# Altium PCB ESP32.PcbDoc
Units mil, origin at the board's own origin, x right, y up, seen from the top; angles counter-clockwise.
Board outline 1115 x 1915 mil, 4 copper layers (Top Layer, GND, PWR, Bottom Layer), stack 23.756 mil thick; 30 components, 24 nets, 166 pads, 115 vias.
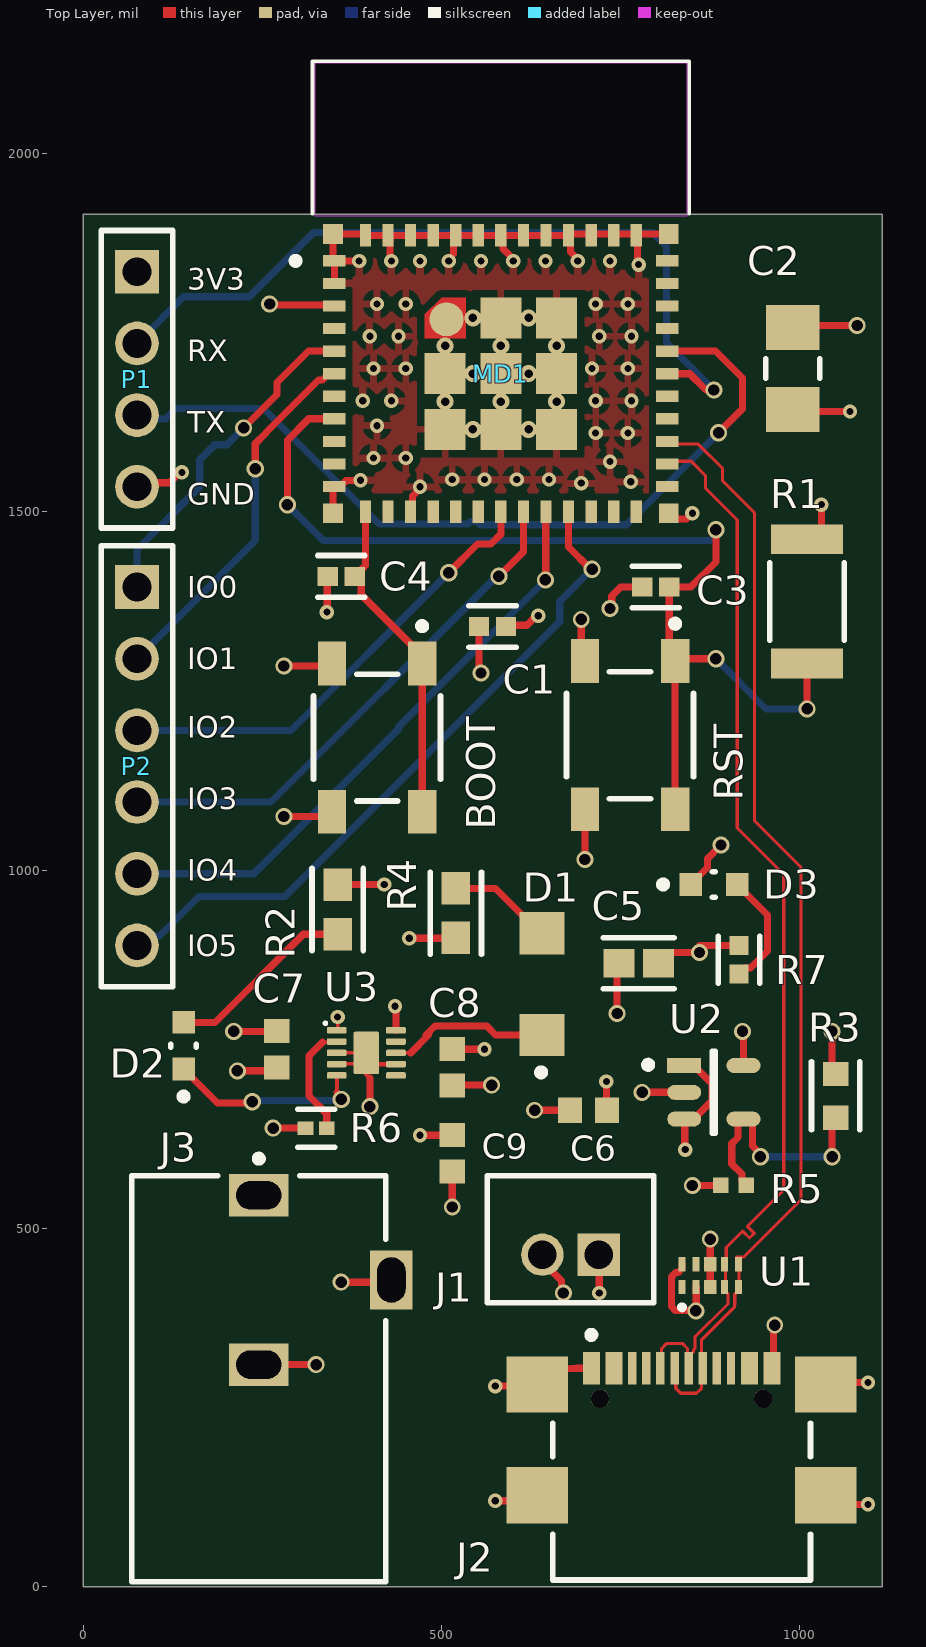
[diagram p0: Top Layer view]
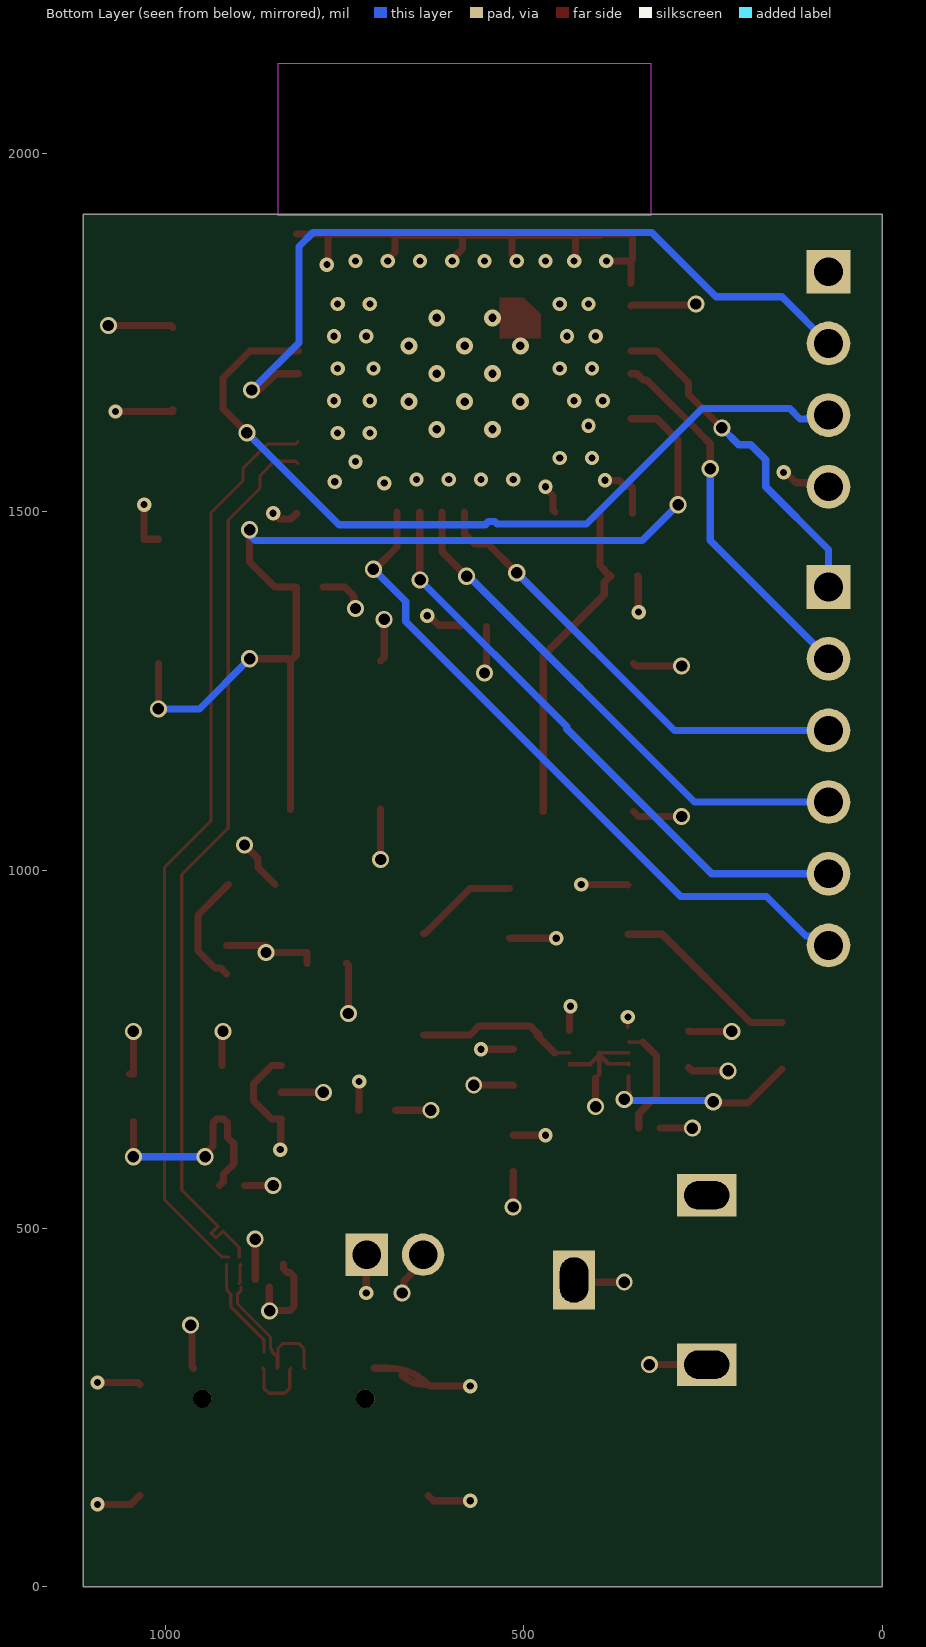
[diagram p1: Bottom Layer view, seen from below]
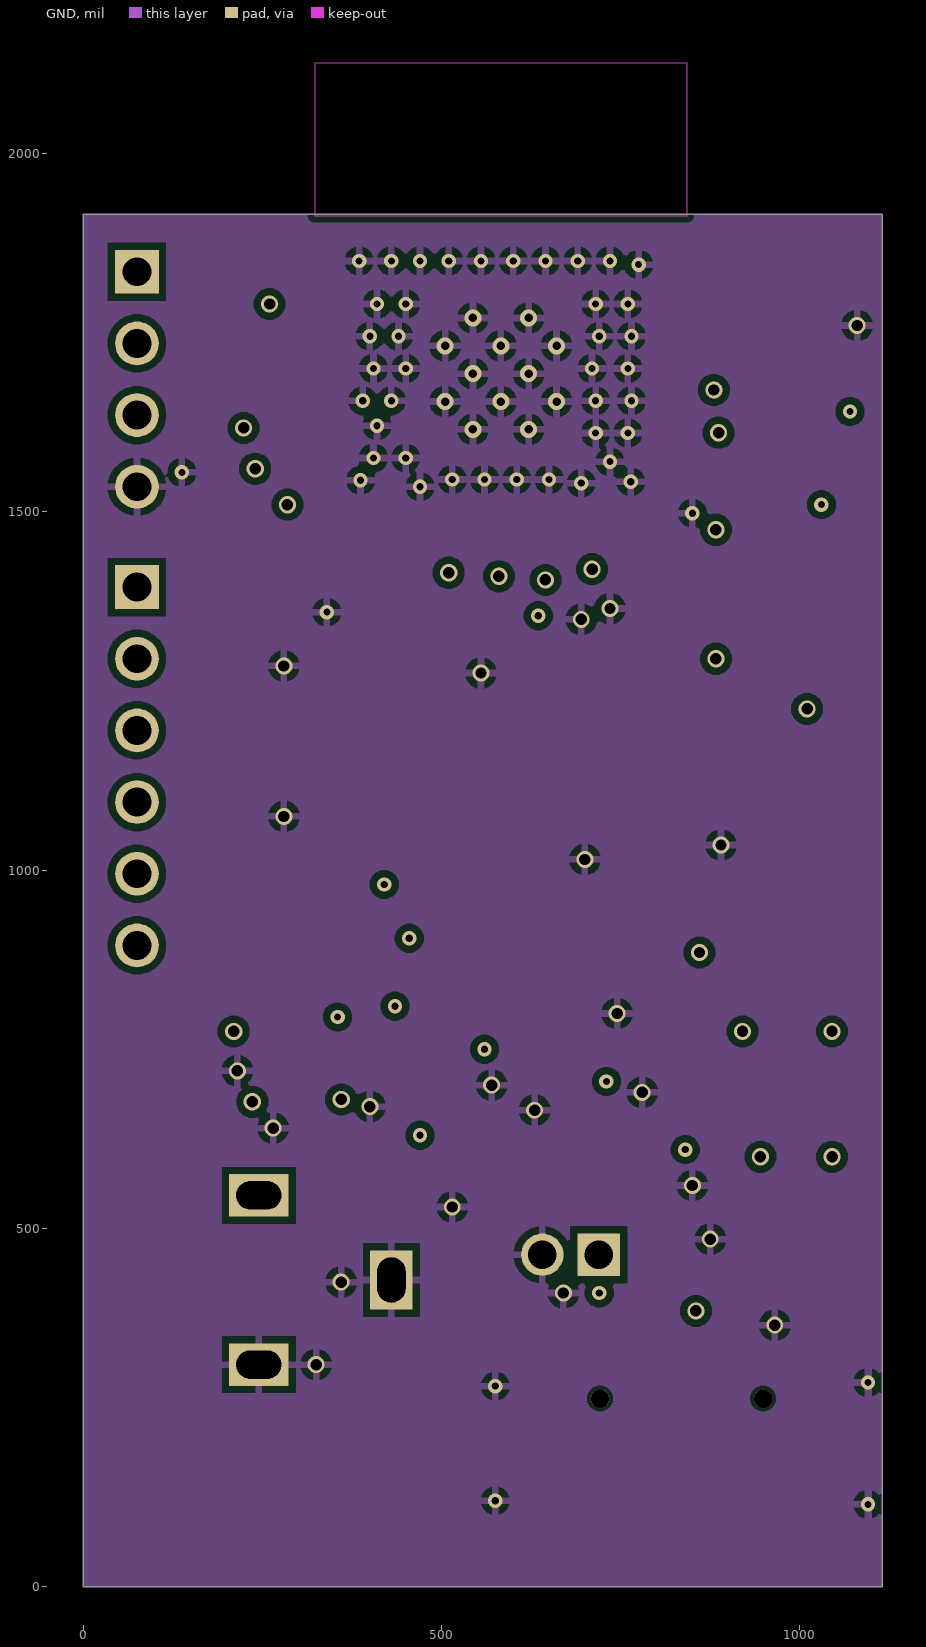
[diagram p2: GND]
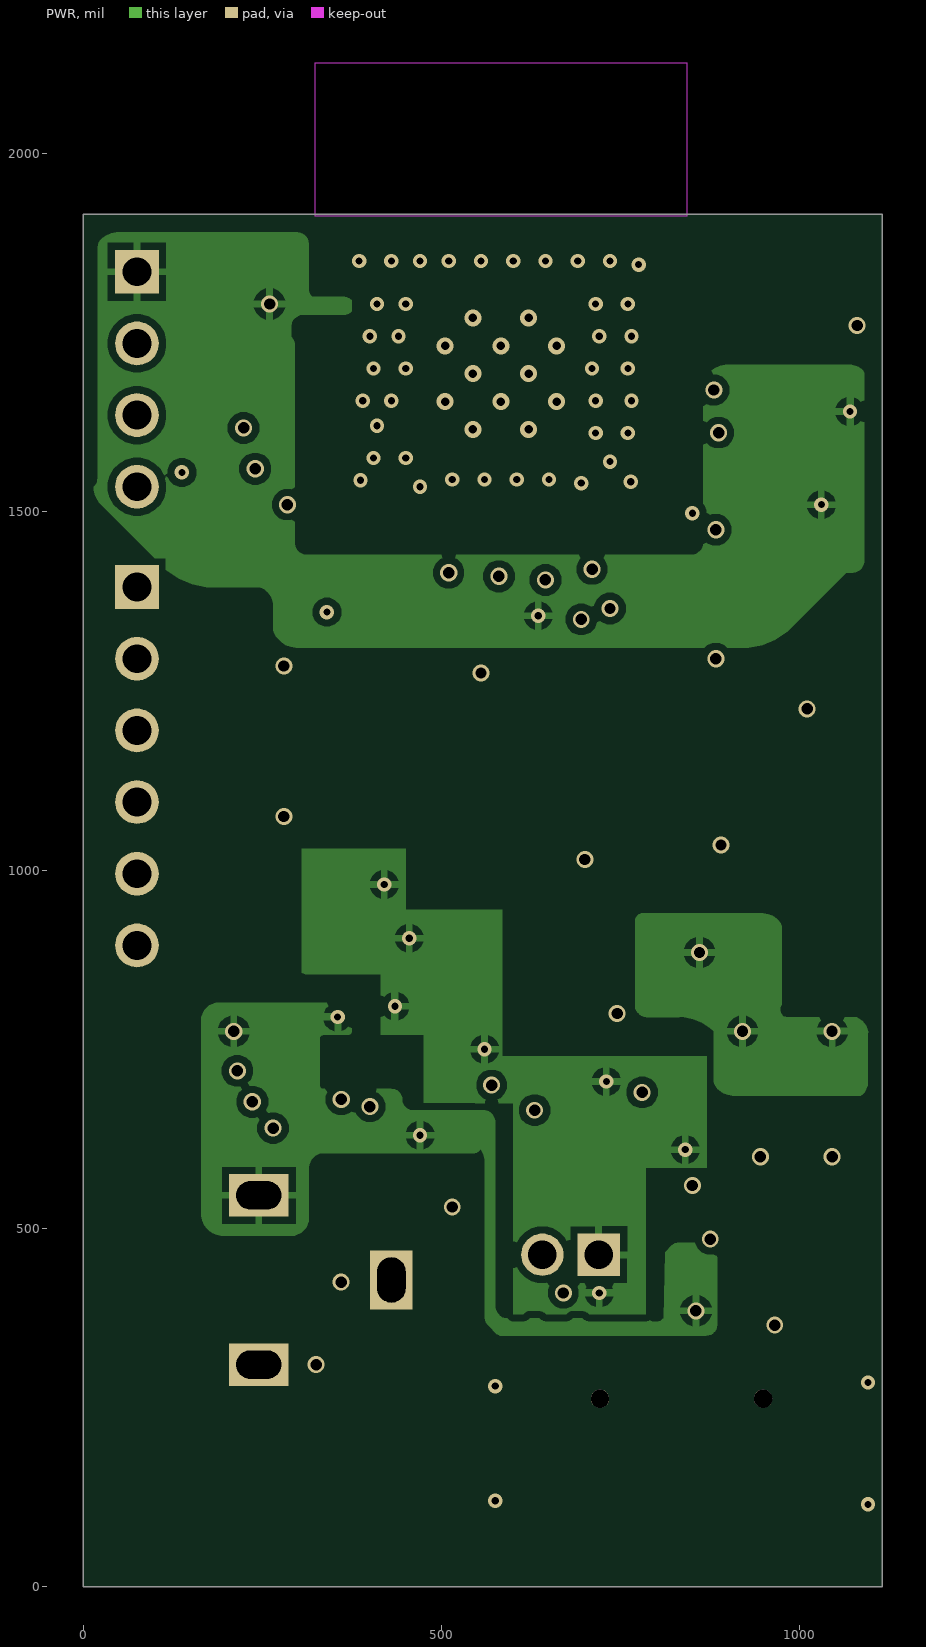
[diagram p3: PWR]
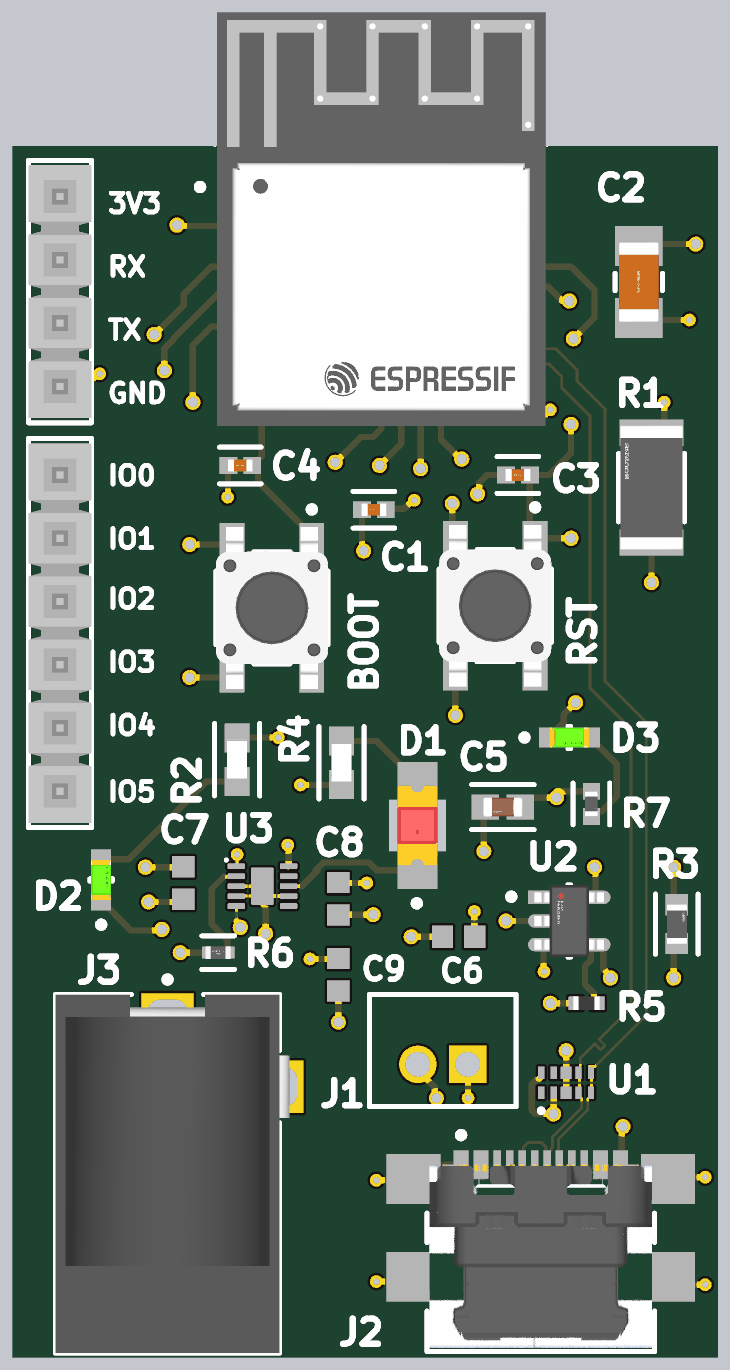
[diagram p4: 3D render of the assembled board from above, using the file's embedded part models]

## Layer stack, top to bottom
Top Solder: solder mask 0.4, Solder Resist, Dk 3.5
Top Layer: signal copper 1.4
Dielectric 1: prepreg 2.8, PP-006, Dk 4.1
GND: signal copper 1.378
Dielectric 2: dielectric 12.6, FR-4, Dk 4.8
PWR: signal copper 1.378
Dielectric 3: prepreg 2.8, PP-006, Dk 4.1
Bottom Layer: signal copper 1.4
Bottom Solder: solder mask 0.4, Solder Resist, Dk 3.5

## Board outline
0,0 1115,0 1115,1915 0,1915

## Design rules (kind name [scope] priority, off if disabled: settings)
Clearance USBDiff [InDifferentialPair('USB_D')] p1: gap=5 ignorepadtopadclearanceinfootprint=FALSE
Clearance ESP32 [InComponent('C1') OR InComponent('C3') OR InComponent('C4') OR InComponent('U3') OR InComponent('U1') OR InComponent('R6') OR InComponent('J2')] p2: gap=5 ignorepadtopadclearanceinfootprint=FALSE
Clearance [All] p3: gap=10 ignorepadtopadclearanceinfootprint=FALSE
DiffPairsRouting USB [InDifferentialPair('USB_D')] p1: maxlimit=5 minlimit=5 mostfreqgap=5 toplayer_minwidth=4.35 toplayer_maxwidth=4.35 toplayer_prefwidth=4.35 midlayer1_minwidth=2.26 midlayer1_maxwidth=2.26 midlayer1_prefwidth=2.26 midlayer2_minwidth=2.26 midlayer2_maxwidth=2.26 midlayer2_prefwidth=2.26 bottomlayer_minwidth=4.35 bottomlayer_maxwidth=4.35 bottomlayer_prefwidth=4.35 impedanceprofiledriven=TRUE impedanceprofileid={25C95724-DC9A-46B8-899E-AF0878F21530} impedanceprofilevalue=90.000000 maxuncoupledlength=500
DiffPairsRouting [InDifferentialPair('USB_D')] p2: maxlimit=5 minlimit=5 mostfreqgap=5 toplayer_minwidth=4.35 toplayer_maxwidth=4.35 toplayer_prefwidth=4.35 midlayer1_minwidth=2.26 midlayer1_maxwidth=2.26 midlayer1_prefwidth=2.26 midlayer2_minwidth=2.26 midlayer2_maxwidth=2.26 midlayer2_prefwidth=2.26 bottomlayer_minwidth=4.35 bottomlayer_maxwidth=4.35 bottomlayer_prefwidth=4.35 impedanceprofiledriven=TRUE impedanceprofileid={25C95724-DC9A-46B8-899E-AF0878F21530} impedanceprofilevalue=90.000000 maxuncoupledlength=500
MinimumSolderMaskSliver SmallerComp [InComponent('U1') OR InComponent('U3') OR InComponent('MDI') OR InComponent('J2')] p1: minsoldermaskwidth=1
MinimumSolderMaskSliver SmallComp [All] p2: minsoldermaskwidth=4
MinimumSolderMaskSliver [All] p3: minsoldermaskwidth=10
PolygonConnect [All] p1: connectstyle=Relief reliefconductorwidth=10 reliefentries=4 polygonreliefangle="90 Angle" airgapwidth=10
RoomDefinition Room_U3 [InComponentClass('Room Definition1')] p1: confinementstyle=ConfineIn formatcopy=TRUE lockcomponents=FALSE outline 323.98,688.74 323.98,801.26 465.04,801.26 465.04,688.74
RoutingVias [All] p1: holewidth=28 width=50 viastyle="Through Hole" minholewidth=28 minwidth=50 maxholewidth=28 maxwidth=50
SilkToSolderMaskClearance MinSilkClearance [InComponent('U3') OR InComponent('C2') OR InComponent('D1') OR InComponent('R1')] p1: minsilkscreentomaskgap=2 clearancetoexposedcopper=TRUE
SilkToSolderMaskClearance [IsPad] p2: minsilkscreentomaskgap=10 clearancetoexposedcopper=TRUE
SolderMaskExpansion [All] p1: expansion=4 istentingtop=FALSE
SupplyNets "Schematic Supply Nets" [InNet('GND')] p1: voltage=0.000
Width RoomCon [WithinRoom('Room_U3')] p1: maxlimit=6 minlimit=5 preferedwidth=5
Width [All] p2: maxlimit=10 minlimit=10 preferedwidth=10
27 further rules are at their usual default settings.

## Classes and differential pairs
component class "Room Definition1": U3
differential pair USB_D: +USB_D_P -USB_D_N

## Components (designator, comment, footprint, x,y, rotation, side; value= is the part's Value field where it differs from the comment)
BOOT "BOOT" FP-PTS647SM38SMTR2LFS-MFG 410,1185 r270 top (schematic designator SW2)
C1 "HMK105B7103MVHFE" FP-0402-L_1_0_0_05-W_0_5-IPC_A 571.16,1340 r180 top
C2 "LMK316AB7106ML-T" FP-1206-L_3_2_0_2-W_1_6_0-IPC_A 990,1700 r90 top
C3 "HMK105B7103MVHFE" FP-0402-L_1_0_0_05-W_0_5-IPC_A 798.84,1395 r180 top
C4 "HMK105B7103MVHFE" FP-0402-L_1_0_0_05-W_0_5-IPC_A 360,1410 r180 top
C5 "GRM188Z71A106KA73J" FP-GRM188-0_2-IPC_B 775,870 r180 top
C6 "C0603C105K4RACTU" CAPC1608X90X35LL15T15 705,665 r0 top
C7 "C0603C105K4RACTU" CAPC1608X90X35LL15T15 270,750 r90 top
C8 "C0603C105K4RACTU" CAPC1608X90X35LL15T15 515,725 r90 top
C9 "C0603C105K4RACTU" CAPC1608X90X35LL15T15 515,605 r90 top
D1 "LTST-C230EKT" FP-LTST-C230EKT-MFG 640,840.87 r90 top
D2 "APT1608ZGCK" FP-APT1608ZGCK-MFG 140,755 r90 top
D3 "APT1608ZGCK" FP-APT1608ZGCK-MFG 880,980 r0 top
J1 "B2B-PH-K-S(LF)(SN)" JST-B2B-PH-K-S_V 680,485 r180 top
J2 "USB4110-GF-A" FP-USB4110-GF-A-MFG 835,160 r0 top
J3 "PJ-102BH" CUI-PJ-102BH_V 245,428.11 r270 top
MD1 "ESP32-C3-MINI-1-N4" FP-ESP32-C3-MINI-1-N4-MFG 582.76,1692.76 r0 top
P1 "TSW-104-08-G-S" SMTC-TSW-104-08-X-S 75,1835 r270 top
P2 "TSW-106-23-G-S" SMTC-TSW-106-23-X-S 75,1395 r270 top
R1 "CR2010-JW-103ELF" FP-CR2010-IPC_C 1010,1375 r90 top
R2 "RN73R1JTTD1501B25" FP-RN73R1J-IPC_A 355,945 r270 top
R3 "AT0603BRD0740KL" FP-AT0603-IPC_B 1050,685 r90 top
R4 "RN73R1JTTD1501B25" FP-RN73R1J-IPC_A 520,940 r90 top
R5 "ERJ-2RKF2003X" RESC1005X40X25NL05T05 907.28,560 r0 top
R6 "CRGCQ0402J1K0" FP-CRGCQ0402-IPC_C 325,640 r180 top value=1KΩ
R7 "TFCR0402-16W-E-1001DT" FP-TFCR0402-IPC_A 915,875 r270 top
RST "RESET" FP-PTS647SM38SMTR2LFS-MFG 762.99,1188.35 r270 top (schematic designator SW1)
U1 "ESD7104MUTAG" ONSC-UDFN-10-517BB-01_V 875,434.25 r90 top
U2 "TLV75801PDBVR" FP-DBV0005A-IPC_C 880,690 r0 top
U3 "BQ24040DSQR" DSQ0010A_V 395,745 r0 top

## Footprints (in the part's own frame and the unit in brackets; to place one, negate y for a bottom-side part, rotate by r counter-clockwise, add the part's x,y. Pads: shape width x height; smd on the part's side, far side on the other; paste and mask are expansions set on the pad)
CAPC1608X90X35LL15T15 [mm] "Chip Capacitor, 2-Leads, Body 1.60x0.81mm, IPC High Density"
  rect 0.85x0.9 smd: 1(-0.65,0) 2(0.65,0)
  body extent -0.88,-0.48 0.87,0.48, height 0.9
CUI-PJ-102BH_V [mm] "THD, 3-Leads, Body 14.4x9mm, Height 11mm"
  rect 1.5x2.1 hole 1 slot 1.6 at 90 deg: 1(-3,0) 2(3,0)
  rect 2.1x1.5 hole 1 slot 1.6 at 0 deg: 3(0,4.7)
  silkscreen extent -4.42,-4.5 10.7,4.5, body extent -3.7,-4.5 10.7,4.9, height 11
DSQ0010A_V [mm] "SON, 10-Leads, Body 2x2mm, Pitch 0.4mm, Thermal Pad 1.5x0.9mm"
  rrect43% 0.7x0.23 smd: 1(-1.05,0.8) 2(-1.05,0.4) 3(-1.05,0) 4(-1.05,-0.4) 5(-1.05,-0.8) 6(1.05,-0.8) 7(1.05,-0.4) 8(1.05,0) 9(1.05,0.4) 10(1.05,0.8)
  rrect11% 0.9x1.5 smd: 11(0,0)
  silkscreen extent -1.5,1 -1.4,1.1, body extent -1,-1 1,1, height 0.8
FP-0402-L_1_0_0_05-W_0_5-IPC_A [mil]
  rect 28.16x26.48 smd paste+0 mask+0: 1(-18.84,0) 2(18.84,0)
  silkscreen extent -33,-29 33,29, body extent -41,-21 41,21, height 10
FP-1206-L_3_2_0_2-W_1_6_0-IPC_A [mil]
  rect 63.17x75.05 smd paste+0 mask+0: 1(-57.12,0) 2(57.12,0)
  silkscreen extent -14,-38 14,38, body extent -108,-57 108,57, height 10
FP-APT1608ZGCK-MFG [mm]
  rect 0.8x0.8 smd paste+0 mask+0: 1(-0.825,0) 2(0.825,0)
  silkscreen extent -1.92,-0.45 0.05,0.45, body extent -1.33,-0.55 1.33,0.55, height 0.25
FP-AT0603-IPC_B [mil]
  rect 33.81x35.91 smd paste+0 mask+0: 1(-30.58,0) 2(30.58,0)
  silkscreen extent -47,-34 47,34, body extent -57,-28 57,28, height 10
FP-CR2010-IPC_C [mil]
  rect 41.56x100.72 smd paste+0 mask+0: 1(-86.66,0) 2(86.66,0)
  silkscreen extent -54,-52 54,52, body extent -111,-56 111,56, height 10
FP-CRGCQ0402-IPC_C [mil]
  rect 22.03x18.6 smd paste+0 mask+0: 1(-14.81,0) 2(14.81,0)
  silkscreen extent -26,-27 26,27, body extent -30,-15 30,15, height 10
FP-DBV0005A-IPC_C [mm]
  rect 1.205x0.532 smd paste+0 mask+0: 1(-1.05,0.95)
  rrect100% 1.205x0.532 smd paste+0 mask+0: 2(-1.05,0) 3(-1.05,-0.95) 4(1.05,-0.95) 5(1.05,0.95)
  silkscreen extent -2.45,-1.45 0.05,1.45, body extent -1.75,-1.55 1.75,1.55, height 0.25
FP-ESP32-C3-MINI-1-N4-MFG [mm]
  rect 0.8x0.4 smd paste+0 mask+0: 1(-5.9,4) 2(-5.9,3.2) 3(-5.9,2.4) 4(-5.9,1.6) 5(-5.9,0.8) 6(-5.9,0) 7(-5.9,-0.8) 8(-5.9,-1.6) 9(-5.9,-2.4) 10(-5.9,-3.2) 11(-5.9,-4) 25(5.9,-4) 26(5.9,-3.2) 27(5.9,-2.4) 28(5.9,-1.6) 29(5.9,-0.8) 30(5.9,0) 31(5.9,0.8) 32(5.9,1.6) 33(5.9,2.4) 34(5.9,3.2) 35(5.9,4)
  rect 0.4x0.8 smd paste+0 mask+0: 12(-4.8,-4.9) 13(-4,-4.9) 14(-3.2,-4.9) 15(-2.4,-4.9) 16(-1.6,-4.9) 17(-0.8,-4.9) 18(0,-4.9) 19(0.8,-4.9) 20(1.6,-4.9) 21(2.4,-4.9) 22(3.2,-4.9) 23(4,-4.9) 24(4.8,-4.9) 36(4.8,4.9) 37(4,4.9) 38(3.2,4.9) 39(2.4,4.9) 40(1.6,4.9) 41(0.8,4.9) 42(0,4.9) 43(-0.8,4.9) 44(-1.6,4.9) 45(-2.4,4.9) 46(-3.2,4.9) 47(-4,4.9) 48(-4.8,4.9)
  rect 1.45x1.45 smd paste+0 mask+0: 49(-1.975,-1.975) 49(-1.975,0) 49(0,-1.975) 49(0,0) 49(0,1.975) 49(1.975,-1.975) 49(1.975,0) 49(1.975,1.975)
  round 1.207 smd paste+0 mask+0: 49(-1.926,1.926)
  rect 0.7x0.7 smd paste+0 mask+0: 50(5.95,4.95) 51(5.95,-4.95) 52(-5.95,-4.95) 53(-5.95,4.95)
  Top Layer region: -2.7,1.25 -2.7,2.1 -2.1,2.7 -1.25,2.7 -1.25,1.25
  Keep-Out Layer region: -6.6,5.6 6.6,5.6 6.6,11 -6.6,11
  silkscreen extent -7.4,3.88 6.68,11.07, body extent -6.78,-5.77 6.78,11.17, height 0.25
FP-GRM188-0_2-IPC_B [mil]
  rect 43.51x39.61 smd paste+0 mask+0: 1(-27.58,0) 2(27.58,0)
  silkscreen extent -49,-36 49,36, body extent -59,-30 59,30, height 10
FP-LTST-C230EKT-MFG [mm]
  rect 1.5x1.6 smd paste+0 mask+0: 1(-1.8,0) 2(1.8,0)
  silkscreen extent -3.25,-0.1 -3,0.15, body extent -2.65,-0.95 2.65,0.95, height 0.25
FP-PTS647SM38SMTR2LFS-MFG [mm]
  rect 1.55x1 smd paste+0 mask+0: 1(-2.625,1.6) 2(2.625,1.6) 3(-2.625,-1.6) 4(2.625,-1.6)
  silkscreen extent -4.07,-2.25 2.25,2.25, body extent -3.5,-2.42 3.5,2.42, height 0.25
FP-RN73R1J-IPC_A [mil]
  rect 45.5x39.85 smd paste+0 mask+0: 1(-34.46,0) 2(34.46,0)
  silkscreen extent -57,-36 57,36, body extent -77,-40 77,40, height 10
FP-TFCR0402-IPC_A [mil]
  rect 26.19x26.48 smd paste+0 mask+0: 1(-19.83,0) 2(19.83,0)
  silkscreen extent -33,-29 33,29, body extent -41,-21 41,21, height 10
FP-USB4110-GF-A-MFG [mm]
  rect 2.18x2 smd paste+0 mask+0: 1(-5.11,3.105) 2(5.11,3.105) 3(-5.11,-0.825) 4(5.11,-0.825)
  rect 0.6x1.15 smd paste+0 mask+0: A1-B12(-3.2,3.68) A4-B9(-2.4,3.68) B1-A12(3.2,3.68) B4-A9(2.4,3.68)
  rect 0.3x1.15 smd paste+0 mask+0: A5(-1.25,3.68) A6(-0.25,3.68) A7(0.25,3.68) A8(1.25,3.68) B5(1.75,3.68) B6(0.75,3.68) B7(-0.75,3.68) B8(-1.75,3.68)
  round 0.65 hole 0.65 unplated paste-2539.97 mask+0: ""(-2.89,2.605) ""(2.89,2.605)
  silkscreen extent -4.57,-3.83 4.57,4.99, body extent -6.3,-3.92 6.3,4.36, height 0.25
JST-B2B-PH-K-S_V [mm] "Connector, 2-Leads, Body 5.9x4.5mm, Pitch 2mm"
  rect 1.5x1.5 hole 1: 1(-1,0.55)
  round 1.5 hole 1: 2(1,0.55)
  silkscreen extent -2.95,-2.25 2.95,2.25, body extent -2.95,-2.25 2.95,2.25, height 6
ONSC-UDFN-10-517BB-01_V [mm] "SON, 10-Leads, Body 2.5x1mm, Pitch 0.5mm"
  rect 0.5x0.25 smd: 1(-0.4,1) 2(-0.4,0.5) 4(-0.4,-0.5) 5(-0.4,-1) 6(0.4,-1) 7(0.4,-0.5) 9(0.4,0.5) 10(0.4,1)
  rect 0.5x0.45 smd: 3(-0.4,0) 8(0.4,0)
  silkscreen extent -1.17,0.95 -1.08,1.05, body extent -0.5,-1.25 0.5,1.25, height 0.55
RESC1005X40X25NL05T05 [mm] "Chip Resistor, 2-Leads, Body 1.05x0.55mm, IPC Medium Density"
  rect 0.55x0.55 smd: 1(-0.45,0) 2(0.45,0)
  body extent -0.53,-0.28 0.53,0.28, height 0.4
SMTC-TSW-104-08-X-S [mm] ".025 SQ Post Terminal Strip Assembly, 1x4 Pins, Vertical, 2.54mm Pitch, Male"
  rect 1.55x1.55 hole 1.02: 1(0,0)
  round 1.55 hole 1.02: 2(2.54,0) 3(5.08,0) 4(7.62,0)
  silkscreen extent -1.46,-1.27 9.08,1.27, body extent -1.27,-1.27 8.89,1.27, height 8.38
SMTC-TSW-106-23-X-S [mm] ".025 SQ Post Terminal Strip Assembly, 1x6 Pins, Vertical, 2.54mm Pitch, Male"
  rect 1.55x1.55 hole 1.02: 1(0,0)
  round 1.55 hole 1.02: 2(2.54,0) 3(5.08,0) 4(7.62,0) 5(10.16,0) 6(12.7,0)
  silkscreen extent -1.46,-1.27 14.16,1.27, body extent -1.27,-1.27 13.97,1.27, height 8.38

## Part data
BOOT RST: library part CMP-10040-000031-1, "TACT 4.5 X 4.5, 3.8 MM H, 1.8N,", Max Operating Temperature=70°C, Min Operating Temperature=-20°C, Operating Force=180gf, Ratings=IP40, Actuator Type=Standard, Illumination Type=Non-Illuminated, Mechanical Life=100000Cycles, Mount="Surface Mount", Packaging="Cut Tape", Switch Function=Off-Mom, Switch Travel=0.25mm, Termination="Gull Wing", Throw Configuration=SPST
C1 C3 C4: library part CMP-14477-001757-2, "None"
C2: library part CMP-14477-003406-2, "None", Capacitance=10uF, Case/Package=1206, Dielectric=X7R, Max Operating Temperature=125°C, Min Operating Temperature=-55°C, Tolerance=20%, Voltage=10V, Depth=1.6mm, Height=1.6mm, Length=0.126inch, Mount="Surface Mount", Packaging="Tape and Reel", RoHS Compliant=Yes, Thickness=0.071inch, Voltage Rating=10V, Width=0.063inch
C5: library part CMP-06035-020296-1, "Chip Multilayer Ceramic Capacitors for General Purpose, 0603, 10uF, X7R, 15%, 10%, 10V"
C6 C7 C8 C9: library part CMP-2006-02298-2, Manufacturer=Kemet, Part Number=C0603C105K4RACTU
D1: library part CMP-22017-000030-1, "LED RED CLEAR CHIP SMD", Case Code (Imperial)=1206, Case Code (Metric)=3216, Color=Red, Forward Current=30mA, Forward Voltage=2V, Lens Color=Colorless, Max Operating Temperature=85°C, Min Operating Temperature=-55°C, Package Quantity=1, Power Dissipation=100mW, Reverse Voltage=5V, Test Current=10mA, Case/Package=1206, Depth=1.6mm, Dominant Wavelength=621nm, Height=1.1mm, Illumination Color=Red, Lead Free="Lead Free", Length=3.2mm, Lens Style=Diffused, Lens Transparency=Clear, Luminous Intensity=6mcd, Mount="Surface Mount", Number of Elements=1, Number of LEDs=1, Number of Pins=2, Packaging="Tape and Reel", Power Rating=100mW, Radiation Hardening=No, Viewing Angle=130°, Wavelength=630nm, Width=1.6mm
D2 D3: library part CMP-44529-000024-1, "LED GREEN CLEAR CHIP SMD", Case Code (Imperial)=0603, Case Code (Metric)=1608, Color=Green, Forward Current=20mA, Forward Voltage=3.3V, Lens Color=Colorless, Max Operating Temperature=85°C, Min Operating Temperature=-40°C, Package Quantity=1, Case/Package=0603, Dominant Wavelength=525nm, Height=0.75mm, Illumination Color=Green, Lead Free="Lead Free", Length=1.6mm, Lens Transparency=Clear, Luminous Intensity=350mcd, Mount="Surface Mount", Packaging="Tape and Reel", Test Current=20mA, Viewing Angle=120°, Width=0.8mm
J1: library part CMP-2000-05162-1, "Male Header, Pitch 2 mm, 1 x 2 Position, Height 6 mm, Tail Length 3.4 mm, -25 to 85 degC, RoHS, Bulk", Manufacturer=JST, Datasheet URL=http://datasheet.octopart.com/B2B-PH-K-S%28LF%29%28SN%29-JST-datasheet-8324864.pdf, Datasheet Version=Nov-08, Manufacturer URL=http://www.jst.com/home2.html, No of Positions=2, Pitch=2mm, Style/Orientation=StraightHeader/Plug, Termination=Crimp, Type=ShroudedHeader
J2: library part CMP-245163-000002-1, "CONN USB 2.0 TYPE-C R/A SMT", Current Rating=3/4.25/1.25/0.25A, Manufacturer=GCT, Package=0, Temperature="-40°C to +85°C", Temperature Range High=+85°C, Temperature Range Low=-40°C, Voltage Rating=20V, Automotive=No, Category=Conn, ComponentLink2Description=Datasheet, ComponentLink2URL=https://gct.co/files/drawings/usb4110.pdf, Conn Orientation="Right Angle", Contact Material=Gold,Nickel, Device Class L1=Connectors, Device Class L2="USB Connectors", Device Class L3=unset, Digikey Description="CONN USB 2.0 TYPE-C R/A SMT", Height=3.46mm, Is Female=yes, Lead Free=Yes, Manufacturer Part Number=USB4110-GF-A, Number Of Contacts=16, Octopart=https://octopart.com/usb4110-gf-a-gct-103941985, RoHS=TRUE, Shielding=true, Standoff Height=0.1mm, Usb Standard="USB 2.0"
J3: library part CMP-2000-06901-1, "Through Hole Right Angle DC Power Jack, 5 A, 2.5 mm Center Pin, 3 Position, -25 to 85 degC, RoHS, Bulk", Current Rating=5A, Flammability Rating=UL94V-0, Insulation Resistance=100MOhms, Manufacturer=CUIInc., Operating Temperature Range=-25Cto+85C, Package Description="3-Pin Through Hole Device, Body 14.4 x 9 mm, Height 11 mm", Voltage Rating=24V, Brand=CUI, Connector Type=DCPowerJack, Contact Gender=Male, Contact Material=Copper, Contact Plating=Nickel, Datasheet URL=http://www.cui.com/product/resource/pj-102bh.pdf, Datasheet Version="Rev. 1.02, 05/2016", Factory Pack Quantity=280, Housing Material=PolybutyleneTerephthalate(PBT), Inside Contact Diameter=2.5mm, Manufacturer URL=http://www.cui.com/, Mounting Angle=Right, Mounting Style=ThroughHole, Mounting Technology=ThroughHole, Outside Contact Diameter=6.5mm, Package Reference=PJ-102BH, Product=Jacks, Product Category=DCPowerConnectors, RoHS=True, Termination Style=ThroughHole
MD1: library part CMP-10700-116589975-1, "Multiprotocol Modules SMD module, ESP32-C3FN4, PCB antenna, -40 C +85 C", Ambient Temperature Range High=85°C, Current - Receiving=84mA, Current - Transmitting=350mA, Max Frequency=2.484GHz, Max Supply Voltage=3.6V, Min Operating Temperature=-40°C, Min Supply Voltage=3V, Data Rate=150Mbps, Height=2.55mm, Interface=SPI, Max Operating Temperature=85°C, Number of GPIO=13
P1: library part CMP-1024-00357-1, "0.025\" SQ Post Header, Through-hole, Vertical, -55 to 125 degC, 2.54 mm Pitch, 4-Pin, Male, RoHS", Manufacturer=Samtec, Temperature Range="-55 to 125 degC", ComponentLink1Description="Manufacturer URL", ComponentLink1URL=http://www.samtec.com, ComponentLink2Description=Datasheet, ComponentLink2URL=http://www.samtec.com/documents/webfiles/pdf/TSW_TH.PDF, ComponentLink3Description="Package Specification", ComponentLink3URL=http://www.samtec.com/documents/webfiles/cpdf/TSW-XXX-XX-XXX-X-XX-XXX-MKT.pdf, DatasheetVersion=F-214, Mounting Technology=Through-hole, Orientation=Vertical, PackageDescription=".025[0.64] SQ. Post Terminal Strip Assembly", PackageReference=TSW-104-08-X-S, PackageVersion="DM, 8/1988", PartNumber=TSW-104-08-G-S, Pitch="2.54 mm", RoHS=True
P2: library part CMP-1024-00396-1, "0.025\" SQ Post Header, Through-hole, Vertical, -55 to 125 degC, 2.54 mm Pitch, 6-Pin, Male, RoHS", Manufacturer=Samtec, Temperature Range="-55 to 125 degC", ComponentLink1Description="Manufacturer URL", ComponentLink1URL=http://www.samtec.com, ComponentLink2Description=Datasheet, ComponentLink2URL=http://www.samtec.com/documents/webfiles/pdf/TSW_TH.PDF, ComponentLink3Description="Package Specification", ComponentLink3URL=http://www.samtec.com/documents/webfiles/cpdf/TSW-XXX-XX-XXX-X-XX-XXX-MKT.pdf, DatasheetVersion=F-214, Mounting Technology=Through-hole, Orientation=Vertical, PackageDescription=".025[0.64] SQ. Post Terminal Strip Assembly", PackageReference=TSW-106-23-X-S, PackageVersion="DM, 8/1988", PartNumber=TSW-106-23-G-S, Pitch="2.54 mm", RoHS=True
R1: library part CMP-07231-003456-1, "Thick Film Chip Resistors 2010 10kΩ 0.5W 5% 200ppm/°C", Case Code (Imperial)=2010, Case Code (Metric)=5025, Max Operating Temperature=155°C, Min Operating Temperature=-55°C, Package Quantity=4000, Power Rating=500mW, Resistance=10kR, Temperature Coefficient=200ppm/°C, Tolerance=5%, Voltage Rating=200V, Case/Package=2010, Composition="Thick Film", Contact Plating=Tin, Height=0.6mm, Length=5mm, Mount="Surface Mount", Packaging="Tape and Reel", Radiation Hardening=No, Termination=SMD/SMT, Width=2.5mm
R2 R4: library part CMP-04015-030520-1, "1.5kΩ ±0.1% 0.1W, 1/10W Chip Resistor 0603 (1608 Metric) Moisture Resistant Thin Film"
R3: library part CMP-03412-038922-1, "Thin Film Chip Resistors Automotive Grade 40kΩ 0.1% 25ppm/°C 0603"
R5: library part CMP-1011-00768-4, "Chip Resistor, 200 KOhm, +/- 1%, 100 mW, -55 to 155 degC, 0402 (1005 Metric), RoHS, Tape and Reel", Case Code (Imperial)=0402, Case Code (Metric)=1005, Manufacturer="Basic Passives", Max Operating Temperature="155 degC", Min Operating Temperature="-55 degC", Package Quantity=10000, Power Rating="100 mW", Resistance="200 KOhm", Tolerance=1%, Voltage Rating="50 V", Case\/Package=0402, ComponentLink1Description="Manufacturer URL", ComponentLink1URL=http://www.panasonic.com/, ComponentLink2Description=Datasheet, ComponentLink2URL=http://industrial.panasonic.com/cdbs/www-data/pdf/RDA0000/AOA0000C86.pdf, DatasheetVersion=04/2015, Height="0.35 mm", Length="1 mm", Mount="Surface Mount", Mounting Technology="Surface Mount", PackageDescription="2-Pin Surface Mount Device, Body 1 x 0.5 mm", PackageReference=0402, Packaging="Tape and Reel", PartNumber=ERJ-2RKF2003X, Pins=2, Radiation Hardening=No, REACH SVHC="No SVHC", RoHSCompliant=true, Width="0.5 mm"
R6: library part CMP-03211-005510-1, "CRGCQ 0402 1K0 5%", Ambient Temperature Range High=+70°C, Manufacturer="TE Connectivity", Package=CRGCQ0402, Power Rating=0.0625W, Resistance=1KΩ, Temperature="-55°C to +155°C", Temperature Coefficient=±100ppm/°C, Temperature Range High=+155°C, Temperature Range Low=-55°C, Tolerance=0.05, Voltage Rating=50V, Automotive=Yes, Category=Res, ComponentLink2Description=Datasheet, ComponentLink2URL=https://www.te.com/commerce/DocumentDelivery/DDEController?Action=showdoc&DocId=Data+Sheet%7F1773204-3%7F1%7Fpdf%7FEnglish%7FENG_DS_1773204-3_1.pdf%7F4-2176347-695, Composition="Thick Film", Device Class L1="Passive Components", Device Class L2=Resistors, Device Class L3="Chip SMD Resistors", Digikey Description="CRGCQ 0402 1K0 5%", Height=0.4mm, Ipc Land Pattern Name=RESC10050X35, Lead Free=Yes, Manufacturer Part Number=CRGCQ0402J1K0, Octopart=https://octopart.com/crgcq0402j1k0-te+connectivity-91018000, RoHS=TRUE, Series=CRGCQ
R7: library part CMP-250906-247784-1, "RES Thin Film,  1kΩ, 0.5%, 0.063W, 25ppm/°C, 0402"
U1: library part CMP-1063-00242-1, "Transient Voltage Suppressor, Low Capacitance ESD Protection for High Speed Data, 10-Pin UDFN, Pb-Free, Tape and Reel", Manufacturer="On Semiconductor", ComponentLink1Description="Manufacturer URL", ComponentLink1URL=http://www.onsemi.com/, ComponentLink2Description=Datasheet, ComponentLink2URL=http://www.onsemi.cn/pub_link/Collateral/ESD7104-D.PDF, ComponentLink3Description="Package Specification", ComponentLink3URL=http://www.onsemi.com/pub_link/Collateral/517BB.PDF, DatasheetVersion="Rev. 2", Direction=Bidirectional, IR Max (uA)=1, Mounting Technology="Surface Mount", Number of Lines=4, PackageDescription="10-Pin Small Outline No-Lead, Body 2.5 x 1 mm, Pitch 0.5 mm", PackageReference=UDFN-10-517BB-01, PackageVersion="Rev. O, 11/2009", Packing="Tape and Reel", PartNumber=ESD7104MUTAG, RoHS=Pb-Free, V(BR) Min (V)=5.5, VRWM Max (V)=5
U2: library part CMP-04917-000142-1, "IC POWER MANAGEMENT SUPERVISORY"
U3: library part CMP-0321-00456-2, "800 mA, Single-Input, Single Cell Li-Ion Battery Charger with Auto Start. Vovp=6.6 V, 3.5 V, -40 to 85 degC, 10-pin SON (DSQ), Green (RoHS & no Sb/Br)", Manufacturer="Texas Instruments", Over Voltage Protection=N, ComponentLink1Description=Datasheet, ComponentLink1URL=http://www.ti.com/general/docs/lit/getliterature.tsp?genericPartNumber=BQ24040&fileType=pdf, DatasheetVersion=SLUS941A, Eco-Plan="Green (RoHS & no Sb/Br)", Lead Acid=N, Li-Ion=N, Li-Polymer=N, Mounting Technology="Surface Mount", NiCd=N, NiMH=N, PackageDescription="10-Pin Plastic Small Outline No-Lead, 2 x 2 x 0.8 mm Body, 0.4 mm Pitch, Exposed Pad", PackageReference=DSQ0010A, PackageVersion="revB, Apr-2010", PartNumber=BQ24040DSQR, SubFamily="Battery Charge Management", Vin(Min)(V)=3.5

## Via types
v1: diameter 20, hole 10, Top Layer to Bottom Layer, 59 vias
v2: diameter 23.62, hole 15.75, Top Layer to Bottom Layer, 25 vias
v3: diameter 24, hole 16, Top Layer to Bottom Layer, 19 vias
v4: diameter 23.62, hole 11.81, Top Layer to Bottom Layer, 12 vias

## Nets (pads, with @x,y where several pads share a name; then routed paths per layer and width w, separated by ;. In a path a pad name is that pad's centre, name@x,y a point inside that pad or via, vN(x,y) a via of type N, cw(c..) or ccw(c..) an arc to the next point about the centre after c; other vN are vias at no path point)
3V3: C5.1 R3.2 R7.1 U2.5 | length 250.6
  Top Layer w10: C5.1 802.58,885 v2(860,885) 860,894.83 R7.1 ; v2(920,775) 921.36,775 U2.5 ; v2(1045,775) 1045,715.58 R3.2
3V3E: C1.1 C2.1 MD1.3 P1.1 R1.2 | length 294
  Top Layer w10: v3(260,1790) 261.38,1788.62 349.09,1788.62 MD1.3 ; C1.1 591.79,1341.79 619.08,1341.79 632.29,1355 v1(635,1355) ; C2.1 990,1640 v1(1070,1640) ; R1.2 1030,1461.66 v1(1030,1510)
5V: C7.2 C9.2 J3.1 U1.2 U1.10 U3.1 | length 256.6
  Top Layer w5: U3.1@355,780.75 v1(355,795)
  Top Layer w10: v3(210,775) 269.41,775 C7.2 ; v1(470,630) 513.57,630 ccw(c513.57,632.02) C9.2 ; U1.10 835.63,444.2 829.77,438.35 826.57,438.35 820.71,432.49 820.71,391.17 826.57,385.32 854.68,385.32 v3(855,385) ; v3@855.32,385.32 U1.2
BT: BOOT.1 BOOT.2 C4.1 MD1.12 | length 463.5
  Top Layer w10: C4.1 C4.1@379.68,1410 ; MD1.12 393.78,1424.94 387.92,1419.08 387.92,1418.24 C4.1@379.68,1410 ; BOOT.2 BOOT.1 472.99,1299.17 387.92,1384.24 387.92,1401.76 C4.1@379.68,1410
CHG: D1.1 U3.8 | length 230.7
  Top Layer w5: U3.8 457,745
  Top Layer w10: 457,745 482,770 478.75,770 491.07,782.32 563.03,782.32 575.36,770 D1.1
EN: C3.1 MD1.8 R1.1 RST.1 RST.2 | length 1512.6
  Top Layer w10: v3(285,1510) 285,1600 314.76,1629.76 MD1.8 ; RST.2 RST.1 ; v3(882.83,1295) 829.29,1295 RST.1 ; v3(882.83,1475) 882.83,1430 847.83,1395 C3.1 817.68,1300 RST.1 ; v3(1010,1225) R1.1
  Bottom Layer w10: v3(285,1510) 335,1460 875,1460 882.83,1467.83 v3(882.83,1475) ; v3(882.83,1295) 952.83,1225 v3(1010,1225)
GND: BOOT.3 BOOT.4 C1.2 C2.2 C3.2 C4.2 C5.2 C6.1 C7.1 C8.1 C9.1 D3.1 J1.2 J2.1 J2.2 J2.3 J2.4 J2.A1-B12 J2.B1-A12 J3.2 J3.3 MD1.1 MD1.2 MD1.11 MD1.14 MD1.36 MD1.37 MD1.38 MD1.39 MD1.40 MD1.41 MD1.42 MD1.43 MD1.44 MD1.45 MD1.46 MD1.47 MD1.48 MD1.49 MD1.50 MD1.51 MD1.52 MD1.53 P1.4 R5.1 R6.2 RST.3 RST.4 U1.3 U1.8 U2.2 U3.3 U3.4 U3.7 U3.11 | length 2961
  Top Layer w5: U3.3 U3.11 ; U3.4@354.13,729.72 U3.11@382.28,729.72
  Top Layer w6: U3.4 U3.4@354.13,729.72 ; U3.11@382.28,729.72 U3.11@395,742.44 ; U3.11 U3.11@395,742.44 ; 400,710 395,715 U3.11@395,741.97 ; U3.7 407.72,729.25 U3.11@395,741.97 ; U3.11@395,741.97 U3.11@395,742.44
  Top Layer w10: P1.4 80.56,1540.56 120.51,1540.56 134.95,1555 v1(137.66,1555) ; v2(215,720) 265.59,720 C7.1 ; J3.2 v2(325,310) ; v2(265,640) R6.2 ; v2(280,1075) 340.35,1075 BOOT.4 ; v2(280,1285) 343.66,1285 BOOT.3 ; v1(340,1360) 340.58,1360.58 340.58,1409.42 C4.2 ; MD1.52 348.5,1533.31 MD1.11@350.33,1535.14 ; MD1.11 358.35,1535.28 366.97,1543.9 386.9,1543.9 v1(387,1544) ; MD1.2 MD1.1 ; v2(360,425) 426.93,425 J3.3 ; v1(385,1850) 384.88,1850.12 350.59,1850.12 MD1.1 ; v2(400,670) 400,710 ; v1(430,1850) 428.09,1851.91 428.09,1882.86 MD1.47 ; MD1.14 459.65,1502.72 459.65,1521.94 470,1532.29 v1(470,1535) ; v1(510,1850) 510,1852.71 516.89,1859.6 516.89,1882.8 MD1.44 ; v2(515,530) C9.1 ; C8.1 515.59,700 v2(570,700) ; C1.2 552.32,1281.37 553.69,1280 555,1280 v2(555,1275) ; v1(575,120) 626.3,120 J2.3 ; v1(575,280) 631.57,280 J2.1 ; v1(600,1850) 600,1852.71 585.63,1867.08 585.63,1882.8 MD1.42 ; v2(630,665) C6.1 ; J1.2 640.63,453.9 667.39,427.14 667.39,412.61 v2(670,410) ; J2.1@670,295 cw(c639.2,325.8) 639.2,282.24 J2.1 ; v1(690,1850) 690,1852.71 680.12,1862.59 680.12,1882.8 MD1.39 ; v2(695,1350) 695,1296.69 RST.3 ; v2(700,1015) RST.4 ; J2.A1-B12 688.47,304.88 ccw(c688.47,227.59) J2.1 ; v2(735,1365) 737.61,1367.61 737.61,1382.62 749.99,1395 C3.2 ; v2(745,800) 745,867.58 C5.2 ; MD1.36 773.37,1884.04 773.37,1846.63 v1(775,1845) ; v2(780,690) U2.2 ; MD1.51 824.84,1490.05 837.95,1490.05 838,1490 842,1490 v1(850,1498) ; MD1.50 679.21,1887.64 MD1.39 ; D3.1 871.04,1003.52 871.04,1016.04 v2(890,1035) ; v2(850,560) R5.1 ; 875,429 U1.8 v2(875,485) ; J2.B1-A12 962.99,306.89 962.99,362.99 v2(965,365) ; C2.2 992.88,1760 v2(1080,1760) ; J2.4 1048.7,115 v1(1095,115) ; J2.2 1038.94,285 v1(1095,285) ; MD1.1 348.5,1852.2 MD1.53 391.81,1887.64 MD1.48 MD1.47 ; MD1.47 MD1.46 MD1.45 MD1.44 ; MD1.44 MD1.43 MD1.42 ; MD1.42 MD1.41 MD1.40 MD1.39
  other v1: 695,1540 764,1542 515,1545 560,1545 605,1545 650,1545 735,1570 405,1575 450,1575 715,1610 760,1610 410,1620 390,1655 430,1655 715,1655 765,1655 405,1700 450,1700 710,1700 760,1700 400,1745 440,1745 720,1745 765,1745 410,1790 450,1790 715,1790 760,1790 470,1850 555,1850 645,1850 735,1850
  other v4: 543.88,1615 621.63,1615 505,1653.88 582.76,1653.88 660.51,1653.88 543.88,1692.76 621.63,1692.76 505,1731.63 582.76,1731.63 660.51,1731.63 543.88,1770.51 621.63,1770.51
IO2: MD1.5 P2.1 | length 474.4
  Top Layer w10: v3(223.82,1617) 270.37,1663.56 270.37,1680.37 314.25,1724.25 MD1.5
  Bottom Layer w10: P2.1 75,1447.34 162.66,1535 162.66,1572.66 183.49,1593.49 200.3,1593.49 v3(223.82,1617)
IO3: MD1.6 P2.2 | length 519.7
  Top Layer w10: v3(240,1560) 240,1595 255,1610 255,1610.62 328.51,1684.13 333.98,1684.13 342.6,1692.76 MD1.6
  Bottom Layer w10: P2.2 240,1460 v3(240,1560)
IO4: MD1.18 P2.3 | length 652.3
  Top Layer w10: v3(510,1415) 550,1455 569.14,1455 582.76,1468.61 MD1.18
  Bottom Layer w10: P2.3 290,1195 v3(510,1415)
IO5: MD1.19 P2.4 | length 739.5
  Top Layer w10: v3(580,1410) 614.25,1444.25 MD1.19
  Bottom Layer w10: P2.4 262.08,1095 577.08,1410 v3(580,1410)
IO6: MD1.20 P2.5 | length 836.7
  Top Layer w10: v3(645,1405) 645.37,1405.37 645.37,1499.47 MD1.20
  Bottom Layer w10: P2.5 237.92,995 440.33,1197.41 440.33,1200.33 v3(645,1405)
IO7: MD1.21 P2.6 | length 962.5
  Top Layer w10: MD1.21 677.24,1450.88 708.13,1420 v3(710,1420)
  Bottom Layer w10: P2.6 88.81,895 101.91,908.1 106.26,908.1 161.57,963.41 281.33,963.41 665,1347.08 665,1375 v3@709.45,1419.45
NetD1_2: D1.2 R4.2 | length 146
  Top Layer w10: R4.2 575.3,974.46 638.03,911.73 D1.2
NetD2_2: D2.2 R2.2 | length 266
  Top Layer w10: D2.2 183.88,787.48 306.94,910.54 R2.2
NetD3_2: D3.2 R7.2 | length 163.6
  Top Layer w10: D3.2 955,937.48 955,887.28 931,863.27 923.1,863.27 R7.2
NetR3_1: R3.1 R5.2 U2.4 | length 327.3
  Top Layer w10: R5.2 919.17,565.83 919.17,575.83 905,590 905,618.26 913.86,627.12 913.86,647.54 918.92,652.6 U2.4 928.8,652.6 933.86,647.54 933.86,614.93 945,603.79 v3(945,600) ; v3(1045,600) R3.1@1045,649.42
  Bottom Layer w10: v3(945,600) 1040,600 v3@1045,595
NetR6_1: R6.1 U3.2 | length 158.3
  Top Layer w5: 333.58,760 352.91,760 U3.2
  Top Layer w10: 333.74,759.84 315,741.1 315,685 339.81,660.19 R6.1
Out: C6.2 C8.2 J1.1 R2.1 R4.1 U2.1 U2.3 U3.10 | length 469.2
  Top Layer w10: R2.1 355.54,980 v1(420,980) ; v1(435,810) 436.34,808.66 U3.10 ; v1(455,905) 519.46,905 R4.1 ; C8.2 515.59,750 v1(560,750) ; J1.1 720,462.72 v1(720,410) ; v1(730,705) 730,665.59 C6.2 ; U2.1 851.89,727.4 877.37,701.93 877.37,678.07 851.89,652.6 U2.3 839.32,651.92 839.32,610.68 v1(840,610)
PG: D2.1 U3.5 | length 277.2
  Top Layer w5: v3@354.13,689.65 U3.5@354.13,713.03
  Top Layer w10: D2.1 187.52,675 234.25,675 v3(235.96,676.72) ; v3@354.13,689.65 360,683.79 v3(360,680)
  Bottom Layer w10: v3(235.96,676.72) 237.6,678.36 358.36,678.36 v3(360,680)
RX: MD1.30 P1.2 | length 1113.2
  Top Layer w10: MD1.30 846.42,1692.76 869.18,1670 v3(880,1670)
  Bottom Layer w10: P1.2 140,1800 231.82,1800 321.82,1890 794.06,1890 814,1870.06 814,1736 v3(880,1670)
TX: MD1.31 P1.3 | length 1153.7
  Top Layer w10: MD1.31 882.32,1724.25 920,1686.57 920,1643.74 v3(886.63,1610.37)
  Bottom Layer w10: P1.3 80.35,1629.65 114.65,1629.65 129,1644 251.65,1644 412.65,1483 537.28,1483 541,1486.72 549.28,1486.72 554,1482 758.26,1482 v3(886.63,1610.37)
USB_D_N: J2.A7 J2.B7 MD1.26 U1.4 U1.7 | length 1524.2
  Top Layer w4.35: J2.B7 807.08,306.49 807.08,332.56 814.21,339.69 836.11,339.69 843.24,332.56 843.24,306.49 J2.A7 844.84,321.61 848.57,325.35 848.9,325.35 851.45,327.89 851.45,330.49 853.57,332.62 853.57,348.57 899.65,394.65 899.65,397.87 899.85,398.07 899.85,408.41 894.69,413.58 U1.4 ; MD1.26 818.79,1570.52 848.29,1570.52 868.29,1550.52 868.29,1533 912.67,1488.61 912.67,1058.75 977.5,993.92 977.5,553.58 928.35,504.43 926.81,502.89 936.36,493.35 929.75,486.74 920.2,496.28 916.46,492.54 897.28,473.36 897.28,460 ; U1.7 896.03,448.65 896.03,424.63 U1.4@897.28,423.39
USB_D_P: J2.A6 J2.B6 MD1.27 U1.5 U1.6 | length 1524.6
  Top Layer w4.35: MD1.27 818.79,1594.52 858.23,1594.52 892.29,1560.46 892.29,1542.94 936.67,1498.55 936.67,1068.69 1001.5,1003.86 1001.5,540.22 921.28,460 911.78,460 ; J2.A6 826.76,303.28 826.76,277.2 833.89,270.07 855.79,270.07 862.92,277.2 862.92,303.28 J2.B6 ; J2.B6@862.92,327.08 862.92,344.7 909,390.78 909,394 909.2,394.2 909.2,408.41 914.37,413.58 U1.5 ; U1.6 915,449.37 U1.5@915,418.5
pads on no net: J2. J2.A4-B9 J2.A5 J2.A8 J2.B4-A9 J2.B5 J2.B8 MD1.4 MD1.7 MD1.9 MD1.10 MD1.13 MD1.15 MD1.16 MD1.17 MD1.22 MD1.23 MD1.24 MD1.25 MD1.28 MD1.29 MD1.32 MD1.33 MD1.34 MD1.35 U1.1 U1.9 U3.6 U3.9

## Polygon pours and split planes (outlines as drawn)
3V3E on PWR "3V3E" (solid, pour order 7): 20,1867.93 cw(c37.07,1867.93) 25,1880 cw(c49.14,1855.86) 49.14,1890 297.93,1890 cw(c297.93,1872.93) 310,1885 cw(c297.93,1872.93) 315,1872.93 315,1810 ccw(c327.07,1810) 318.54,1801.46 320,1800 362.93,1800 cw(c362.93,1782.93) 375,1795 375,1780 373.54,1778.54 cw(c365,1787.07) 365,1775 307.07,1775 ccw(c307.07,1757.93) 295,1770 ccw(c307.07,1757.93) 290,1757.93 290,1745 cw(c277.93,1732.93) 295,1732.93 295,1457.07 ccw(c312.07,1457.07) 300,1445 ccw(c312.07,1457.07) 312.07,1440 850,1440 ccw(c850,1452.07) 858.54,1443.54 861.46,1446.46 ccw(c852.93,1455) 865,1455 865,1670.86 cw(c899.14,1670.86) 875,1695 cw(c899.14,1670.86) 899.14,1705 1070,1705 cw(c1070,1680.86) 1087.07,1697.93 cw(c1080,1690.86) 1090,1690.86 1090,1432.07 cw(c1072.93,1432.07) 1085,1420 cw(c1072.93,1432.07) 1072.93,1415 1065,1415 989.29,1339.29 cw(c918.58,1410) 918.58,1310 300,1310 cw(c300,1346.21) 274.39,1320.61 270,1325 cw(c282.07,1337.07) 265,1337.07 265,1370 ccw(c240.86,1370) 257.93,1387.07 255,1390 ccw(c242.93,1377.93) 242.93,1395 181.42,1395 cw(c181.42,1495) 110.71,1424.29 25,1510 cw(c49.14,1534.14) 15,1534.14 15,1535 ccw(c2.93,1547.07) 20,1547.07 20,1825
Out on PWR "OUT" (solid, pour order 9): 475,770 415,770 415,855 310,855 305,850 305,1030 450,1030 450,945 585,945 585,740 870,740 870,585 785,585 785,380 600,380 600,675 475,675
5V on PWR "5V" (solid, pour order 4): 554.03,610.71 cw(c539.63,596.3) 560,596.3 560,377.07 ccw(c577.07,377.07) 565,365 576.46,353.54 ccw(c585,362.07) 585,350 867.93,350 ccw(c867.93,367.07) 880,355 ccw(c867.93,367.07) 885,367.07 885,460 ccw(c872.94,460) 881.46,468.54 875,475 ccw(c862.93,462.94) 862.93,480 830,480 ccw(c830,467.94) 821.46,476.46 812,467 810,375 cw(c799.92,382.26) 797.93,370 795,370 ccw(c782.93,357.94) 782.93,375 590,375 cw(c590,387.07) 581.46,378.54 580,380 cw(c592.07,392.07) 575,392.07 575,647.93 ccw(c557.94,647.93) 570,660 568.54,661.46 ccw(c560,652.94) 560,665 546.95,664.81 ccw(c545.02,655.16) 545,665 460,665 cw(c460,680) 445,680 ccw(c430,680) 430,695 335,695 cw(c335,700) 330,700 330,765 cw(c335,765) 335,770 370,770 ccw(c370,775) 375,775 375,800 ccw(c360,800) 360,815 190,815 ccw(c190,790) 165,790 165,520 ccw(c195,520) 195,490 290,490 ccw(c290,515) 315,515 315,585 cw(c335,585) 335,605 545,605 ccw(c545,615)
3V3 on PWR "3V3" (solid, pour order 2): 780,940 945.86,940 cw(c945.87,905.89) 970,930 cw(c957.96,917.95) 975,917.93 975,812.07 ccw(c982.8,805.18) 985,795 1075,795 cw(c1072.51,772.51) 1095,770 1095,702.07 cw(c1069.44,705.58) 1085,685 909.14,685 cw(c909.14,719.14) 885,695 cw(c897.07,707.07) 880,707.07 880,775 ccw(c831.74,726.77) 831.72,795 787.07,795 cw(c787.07,812.07) 775,800 cw(c787.07,812.07) 770,812.07 770,932.5 cw(c784.05,924.18)
GND on Top Layer "GND" (solid, pour order 16): 325,1906 841,1906 841,1867 791,1867 791,1520 477,1520 477,1472 440,1472 440,1521 372,1521 372,1470 327,1470 327,1556 376,1556 376,1806 325,1806
GND on GND "GND" (solid, pour order 10): 0,1915 1115,1915 1115,0 0,0

## Silkscreen, mask and mechanical layers (free items; w line width, h text height)
Top Overlay:
  text "3V3" at 145,1810 h30
  text "RX" at 145,1710 h30
  text "TX" at 145,1610 h30
  text "GND" at 145,1510 h30
  text "IO0" at 145,1380 h30
  text "IO1" at 145,1280 h30
  text "IO2" at 145,1185 h30
  text "IO3" at 145,1085 h30
  text "IO4" at 145,985 h30
  text "IO5" at 145,880 h30